# Altium PCB ESP_with_usb_2.PcbDoc
Units mil, origin at the board's own origin, x right, y up, seen from the top; angles counter-clockwise.
Board outline 1102.36 x 570.87 mil, 2 copper layers (Top Layer, Bottom Layer); 21 components, 19 nets, 81 pads, 18 vias.
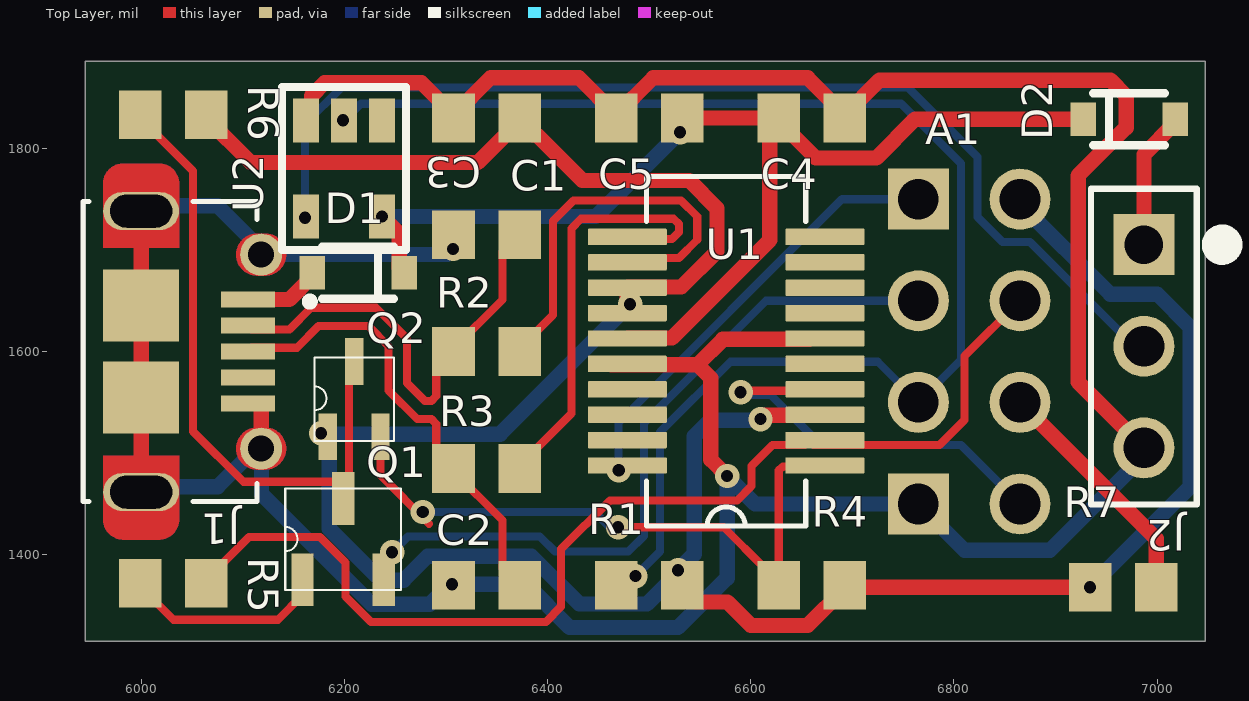
[diagram p0: Top Layer view]
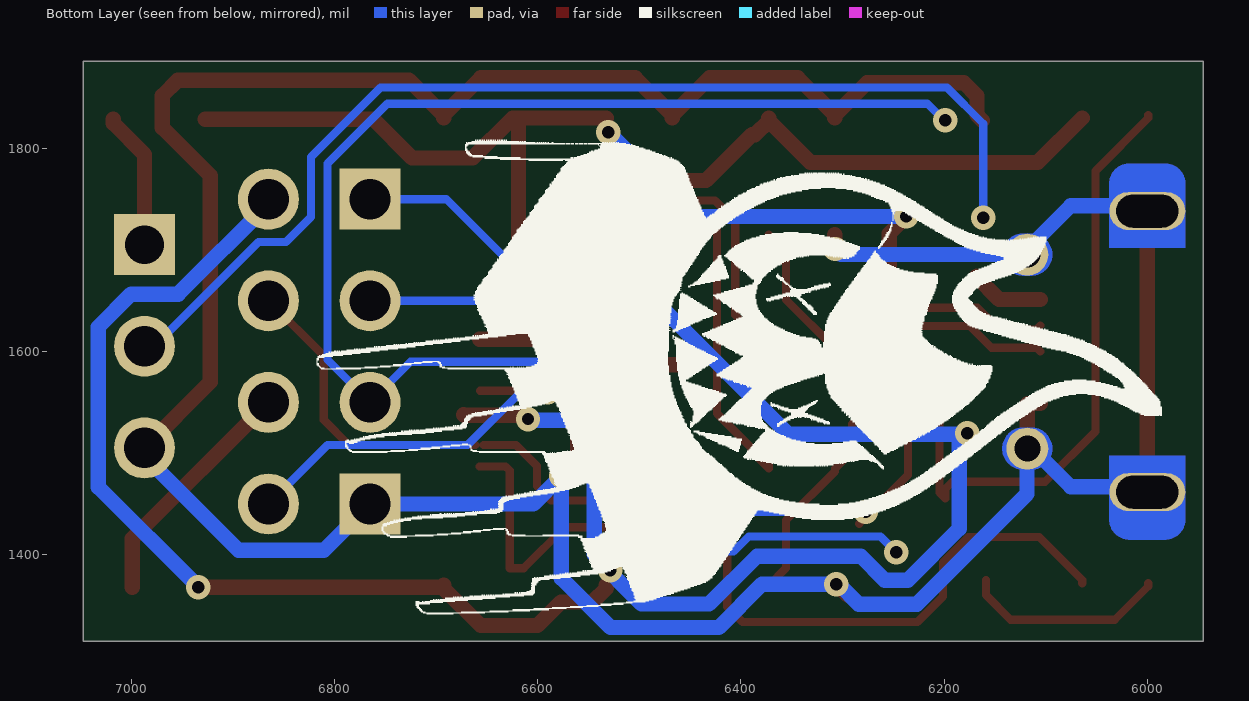
[diagram p1: Bottom Layer view, seen from below]
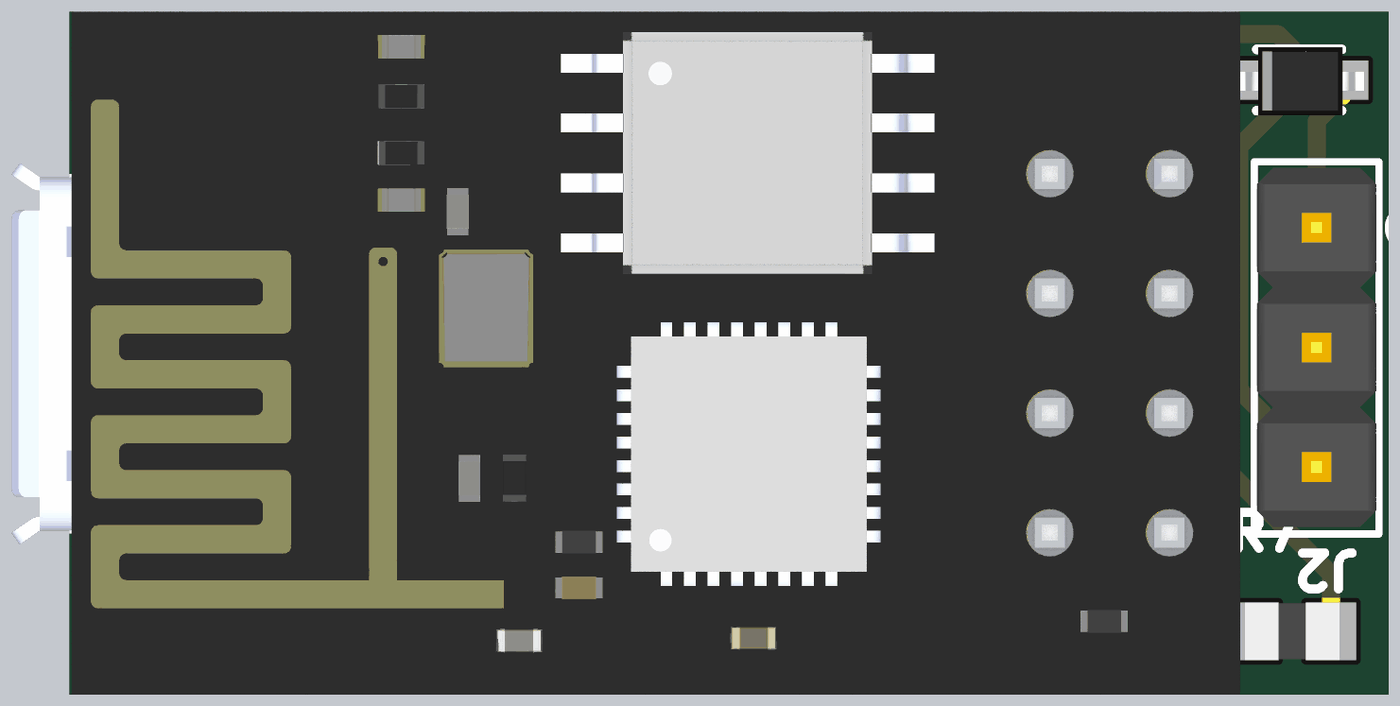
[diagram p2: 3D render of the assembled board from above, using the file's embedded part models]

## Layer stack, top to bottom
Top Solder: solder mask 0.4, Solder Resist, Dk 3.5
Top Layer: signal copper 1.4
Dielectric 1: dielectric 12.6, FR-4, Dk 4.8
Bottom Layer: signal copper 1.4
Bottom Solder: solder mask 0.4, Solder Resist, Dk 3.5

## Board outline
5945,1315 7047.36,1315 7047.36,1885.87 5945,1885.87

## Design rules (kind name [scope] priority, off if disabled: settings)
Clearance [All] p1: gap=8 ignorepadtopadclearanceinfootprint=FALSE except(0: Arc-Hole Track-Hole SMDPad-Hole THPad-Hole Via-Hole Fill-Hole Poly-Hole Region-Hole Text-Hole)
DiffPairsRouting [All] p1: maxlimit=10 minlimit=10 mostfreqgap=10 toplayer_minwidth=8 toplayer_maxwidth=15 toplayer_prefwidth=8 bottomlayer_minwidth=8 bottomlayer_maxwidth=15 bottomlayer_prefwidth=8 maxuncoupledlength=500
MatchedLengths [All] p1: tolerance=50 checknetsindiffpair=TRUE checkdiffpairvsdiffpair=FALSE checkxsignals=FALSE checkothers=FALSE
MinimumSolderMaskSliver [All] p1: minsoldermaskwidth=7.87
PolygonConnect [All] p1: connectstyle=Relief reliefconductorwidth=10 reliefentries=4 polygonreliefangle="90 Angle" airgapwidth=10
RoutingVias [All] p1: holewidth=12 width=24 viastyle="Through Hole" minholewidth=12 minwidth=24 maxholewidth=28 maxwidth=50
SolderMaskExpansion [All] p1: expansion=4
Width [All] p1: maxlimit=15 minlimit=8 preferedwidth=8
28 further rules are at their usual default settings.

## Classes and differential pairs
differential pair USB2: +USB2_P -USB2_N
differential pair USB1: +USB1_P -USB1_N

## Components (designator, comment, footprint, x,y, rotation, side; value= is the part's Value field where it differs from the comment)
A1 "ESP8266" ESP8266 6865,1450 r180 top
C1 "47pF" CC0805N 6340,1715 r0 top value=Value
C2 "47pF" CC0805N 6340,1370 r0 top value=Value
C3 "0.1uF" CC0805N 6340,1830 r0 top value=Value
C4 "0.1uF" CC0805N 6660,1830 r180 top value=Value
C5 "10uF" CC0805N 6500,1830 r0 top value=Value
D1 "Diode, Schottky" SOD-323 6213.58,1677.57 r180 top
D2 "Diode, Schottky" SOD-323 6972.44,1828.74 r0 top
J1 "micro USB B" "Micro USB B (rev 2)" 6002.95,1600 r270 top
J2 "3x Header Pins" "3 HEADER PIN" 6987,1705.28 r90 top value=Value
Q1 "NPN 2222A" SOT-23-3 6198.82,1415.35 r90 top
Q2 "N MOSFET" SOT-323 6209.65,1553.15 r90 top
R1 "10K Ω" CC0805N 6500,1370 r180 top value=Value
R2 "27 Ω" CC0805N 6340,1600 r180 top value=Value
R3 "27 Ω" CC0805N 6340,1485 r180 top value=Value
R4 "10K Ω" CC0805N 6660,1370 r180 top value=Value
R5 "10K Ω" CC0805N 6031.5,1372.05 r0 top value=Value
R6 "10K Ω" CC0805N 6031.5,1833 r180 top value=Value
R7 "10K Ω" CC0805N 6966.54,1368.11 r0 top value=Value
U1 "USB interface" 20-SSOP 6575.79,1600.39 r180 top
U2 "Buffer/level shifter" SOT-23-5 6199.8,1780.21 r270 top value=Value

## Footprints (in the part's own frame and the unit in brackets; to place one, negate y for a bottom-side part, rotate by r counter-clockwise, add the part's x,y. Pads: shape width x height; smd on the part's side, far side on the other; paste and mask are expansions set on the pad)
"3 HEADER PIN" [mil]
  rect 60x60 hole 38 mask+0: 1(0,0)
  round 60 hole 40 mask+0: 2(-100,0) 3(-200,0)
  silkscreen extent -256,-87 55,52, body extent -250,-50 50,50, height 374
20-SSOP [mm]
  rrect10% 1.97x0.41 smd: 1(-2.47,2.857) 2(-2.47,2.222) 3(-2.47,1.587) 4(-2.47,0.952) 5(-2.47,0.317) 6(-2.47,-0.318) 7(-2.47,-0.953) 8(-2.47,-1.588) 9(-2.47,-2.223) 10(-2.47,-2.858) 11(2.47,-2.857) 12(2.47,-2.222) 13(2.47,-1.587) 14(2.47,-0.952) 15(2.47,-0.317) 16(2.47,0.318) 17(2.47,0.953) 18(2.47,1.588) 19(2.47,2.223) 20(2.47,2.858)
  silkscreen extent -1.99,-4.37 1.99,4.37, body extent -3.1,-4.33 3.1,4.33, height 1.76
CC0805N [mil]
  rect 42x48 smd: 1(-32.5,0) 2(32.5,0)
  body extent -39,-24 39,24, height 28
ESP8266 [mil]
  round 60 hole 40: 1(0,0) 2(0,-100) 3(0,-200) 4(0,-300) 6(100,-200) 7(100,-100)
  rect 60x60 hole 40: 5(100,-300) 8(100,0)
  body extent -58,-436 918,135, height 251
"Micro USB B (rev 2)" [mm]
  rect 0.4x1.35 smd: 1(-1.3,2.6) 2(-0.65,2.6) 3(0,2.6) 4(0.65,2.6) 5(1.3,2.6)
  round 1.05 hole 0.65: S1(-2.425,2.925) S2(2.425,2.925)
  oval 0.95x1.9 hole 0.825 slot 1.55 at 90 deg: S3(-3.513,-0.075) S6(3.513,-0.075)
  rect 1.8x1.9 smd: S4(-1.15,-0.075) S5(1.15,-0.075)
  Top Layer region: 3.1,-0.075 2.6,-0.075 2.6,0.875 4.2,0.875 4.226,0.874 4.252,0.872 4.278,0.869 4.304,0.864 4.329,0.858 4.355,0.851 4.379,0.842 4.403,0.832 4.427,0.821 4.45,0.808 4.472,0.794 4.494,0.78 4.515,0.764 4.535,0.747 4.554,0.729 4.572,0.71 4.589,0.69 4.605,0.669 4.619,0.647 4.633,0.625 4.645,0.602 4.657,0.578 4.667,0.554 4.676,0.53 4.683,0.504 4.689,0.479 4.694,0.453 4.697,0.427 4.699,0.401 4.7,0.375 4.7,-0.075 3.925,-0.075 3.925,0.4 3.925,0.414 3.923,0.429 3.922,0.443 3.919,0.457 3.916,0.471 3.912,0.485 3.907,0.499 3.901,0.512 3.895,0.525 3.888,0.537 3.881,0.55 3.872,0.562 3.864,0.573 3.854,0.584 3.844,0.594 3.834,0.604 3.823,0.614 3.812,0.622 3.8,0.631 3.788,0.638 3.775,0.645 3.762,0.651 3.749,0.657 3.735,0.662 3.721,0.666 3.707,0.669 3.693,0.672 3.679,0.673 3.664,0.675 3.65,0.675 3.4,0.675 3.384,0.675 3.369,0.673 3.353,0.671 3.338,0.668 3.322,0.665 3.307,0.66 3.292,0.655 3.278,0.649 3.264,0.642 3.25,0.635 3.237,0.627 3.224,0.618 3.211,0.608 3.199,0.598 3.188,0.587 3.177,0.576 3.167,0.564 3.157,0.551 3.148,0.538 3.14,0.525 3.133,0.511 3.126,0.497 3.12,0.483 3.115,0.468 3.11,0.453 3.107,0.437 3.104,0.422 3.102,0.406 3.1,0.391 3.1,0.375 3.1,-0.075
  Top Layer region: -3.1,-0.075 -2.6,-0.075 -2.6,-1.025 -4.2,-1.025 -4.226,-1.024 -4.252,-1.022 -4.278,-1.019 -4.304,-1.014 -4.329,-1.008 -4.355,-1.001 -4.379,-0.992 -4.403,-0.982 -4.427,-0.971 -4.45,-0.958 -4.472,-0.944 -4.494,-0.93 -4.515,-0.914 -4.535,-0.897 -4.554,-0.879 -4.572,-0.86 -4.589,-0.84 -4.605,-0.819 -4.619,-0.797 -4.633,-0.775 -4.645,-0.752 -4.657,-0.728 -4.667,-0.704 -4.676,-0.68 -4.683,-0.654 -4.689,-0.629 -4.694,-0.603 -4.697,-0.577 -4.699,-0.551 -4.7,-0.525 -4.7,-0.075 -3.925,-0.075 -3.925,-0.55 -3.925,-0.564 -3.923,-0.579 -3.922,-0.593 -3.919,-0.607 -3.916,-0.621 -3.912,-0.635 -3.907,-0.649 -3.901,-0.662 -3.895,-0.675 -3.888,-0.687 -3.881,-0.7 -3.872,-0.712 -3.864,-0.723 -3.854,-0.734 -3.844,-0.744 -3.834,-0.754 -3.823,-0.764 -3.812,-0.772 -3.8,-0.781 -3.788,-0.788 -3.775,-0.795 -3.762,-0.801 -3.749,-0.807 -3.735,-0.812 -3.721,-0.816 -3.707,-0.819 -3.693,-0.822 -3.679,-0.823 -3.664,-0.825 -3.65,-0.825 -3.4,-0.825 -3.384,-0.825 -3.369,-0.823 -3.353,-0.821 -3.338,-0.818 -3.322,-0.815 -3.307,-0.81 -3.292,-0.805 -3.278,-0.799 -3.264,-0.792 -3.25,-0.785 -3.237,-0.777 -3.224,-0.768 -3.211,-0.758 -3.199,-0.748 -3.188,-0.737 -3.177,-0.726 -3.167,-0.714 -3.157,-0.701 -3.148,-0.688 -3.14,-0.675 -3.133,-0.661 -3.126,-0.647 -3.12,-0.633 -3.115,-0.618 -3.11,-0.603 -3.107,-0.587 -3.104,-0.572 -3.102,-0.556 -3.1,-0.541 -3.1,-0.525 -3.1,-0.075
  Top Layer region: 2.6,-1.025 4.2,-1.025 4.226,-1.024 4.252,-1.022 4.278,-1.019 4.304,-1.014 4.329,-1.008 4.355,-1.001 4.379,-0.992 4.403,-0.982 4.427,-0.971 4.45,-0.958 4.472,-0.944 4.494,-0.93 4.515,-0.914 4.535,-0.897 4.554,-0.879 4.572,-0.86 4.589,-0.84 4.605,-0.819 4.619,-0.797 4.633,-0.775 4.645,-0.752 4.657,-0.728 4.667,-0.704 4.676,-0.68 4.683,-0.654 4.689,-0.629 4.694,-0.603 4.697,-0.577 4.699,-0.551 4.7,-0.525 4.7,-0.075 3.925,-0.075 3.925,-0.525 3.925,-0.541 3.923,-0.556 3.921,-0.572 3.918,-0.587 3.915,-0.603 3.91,-0.618 3.905,-0.633 3.899,-0.647 3.892,-0.661 3.885,-0.675 3.877,-0.688 3.868,-0.701 3.858,-0.714 3.848,-0.726 3.837,-0.737 3.826,-0.748 3.814,-0.758 3.801,-0.768 3.788,-0.777 3.775,-0.785 3.761,-0.792 3.747,-0.799 3.733,-0.805 3.718,-0.81 3.703,-0.815 3.687,-0.818 3.672,-0.821 3.656,-0.823 3.641,-0.825 3.625,-0.825 3.4,-0.825 3.384,-0.825 3.369,-0.823 3.353,-0.821 3.338,-0.818 3.322,-0.815 3.307,-0.81 3.292,-0.805 3.278,-0.799 3.264,-0.792 3.25,-0.785 3.237,-0.777 3.224,-0.768 3.211,-0.758 3.199,-0.748 3.188,-0.737 3.177,-0.726 3.167,-0.714 3.157,-0.701 3.148,-0.688 3.14,-0.675 3.133,-0.661 3.126,-0.647 3.12,-0.633 3.115,-0.618 3.11,-0.603 3.107,-0.587 3.104,-0.572 3.102,-0.556 3.1,-0.541 3.1,-0.525 3.1,-0.075 2.6,-0.075 2.6,-1.025
  Top Layer region: -2.6,0.875 -4.2,0.875 -4.226,0.874 -4.252,0.872 -4.278,0.869 -4.304,0.864 -4.329,0.858 -4.355,0.851 -4.379,0.842 -4.403,0.832 -4.427,0.821 -4.45,0.808 -4.472,0.794 -4.494,0.78 -4.515,0.764 -4.535,0.747 -4.554,0.729 -4.572,0.71 -4.589,0.69 -4.605,0.669 -4.619,0.647 -4.633,0.625 -4.645,0.602 -4.657,0.578 -4.667,0.554 -4.676,0.53 -4.683,0.504 -4.689,0.479 -4.694,0.453 -4.697,0.427 -4.699,0.401 -4.7,0.375 -4.7,-0.075 -3.925,-0.075 -3.925,0.375 -3.925,0.391 -3.923,0.406 -3.921,0.422 -3.918,0.437 -3.915,0.453 -3.91,0.468 -3.905,0.483 -3.899,0.497 -3.892,0.511 -3.885,0.525 -3.877,0.538 -3.868,0.551 -3.858,0.564 -3.848,0.576 -3.837,0.587 -3.826,0.598 -3.814,0.608 -3.801,0.618 -3.788,0.627 -3.775,0.635 -3.761,0.642 -3.747,0.649 -3.733,0.655 -3.718,0.66 -3.703,0.665 -3.687,0.668 -3.672,0.671 -3.656,0.673 -3.641,0.675 -3.625,0.675 -3.4,0.675 -3.384,0.675 -3.369,0.673 -3.353,0.671 -3.338,0.668 -3.322,0.665 -3.307,0.66 -3.292,0.655 -3.278,0.649 -3.264,0.642 -3.25,0.635 -3.237,0.627 -3.224,0.618 -3.211,0.608 -3.199,0.598 -3.188,0.587 -3.177,0.576 -3.167,0.564 -3.157,0.551 -3.148,0.538 -3.14,0.525 -3.133,0.511 -3.126,0.497 -3.12,0.483 -3.115,0.468 -3.11,0.453 -3.107,0.437 -3.104,0.422 -3.102,0.406 -3.1,0.391 -3.1,0.375 -3.1,-0.075 -2.6,-0.075 -2.6,0.875
  Top Layer region: 2.425,2.5 2.425,2.3 2.398,2.301 2.37,2.303 2.343,2.306 2.316,2.311 2.289,2.318 2.263,2.326 2.237,2.335 2.211,2.345 2.187,2.357 2.163,2.37 2.139,2.385 2.116,2.4 2.095,2.417 2.074,2.435 2.054,2.454 2.035,2.474 2.017,2.495 2,2.516 1.985,2.539 1.97,2.562 1.957,2.587 1.945,2.611 1.935,2.637 1.926,2.663 1.918,2.689 1.911,2.716 1.906,2.743 1.903,2.77 1.901,2.798 1.9,2.825 1.9,3.025 1.901,3.052 1.903,3.08 1.906,3.107 1.911,3.134 1.918,3.161 1.926,3.187 1.935,3.213 1.945,3.239 1.957,3.263 1.97,3.287 1.985,3.311 2,3.334 2.017,3.355 2.035,3.376 2.054,3.396 2.074,3.415 2.095,3.433 2.116,3.45 2.139,3.465 2.163,3.48 2.187,3.493 2.211,3.505 2.237,3.515 2.263,3.524 2.289,3.532 2.316,3.539 2.343,3.544 2.37,3.547 2.398,3.549 2.425,3.55 2.425,3.35 2.408,3.35 2.391,3.348 2.374,3.346 2.357,3.343 2.341,3.339 2.325,3.334 2.309,3.328 2.293,3.322 2.277,3.315 2.262,3.306 2.248,3.298 2.234,3.288 2.22,3.278 2.208,3.267 2.195,3.255 2.183,3.242 2.172,3.23 2.162,3.216 2.152,3.202 2.144,3.187 2.135,3.173 2.128,3.157 2.122,3.141 2.116,3.125 2.111,3.109 2.107,3.093 2.104,3.076 2.102,3.059 2.1,3.042 2.1,3.025 2.1,2.825 2.1,2.808 2.102,2.791 2.104,2.774 2.107,2.757 2.111,2.741 2.116,2.725 2.122,2.709 2.128,2.693 2.135,2.677 2.144,2.662 2.152,2.648 2.162,2.634 2.172,2.62 2.183,2.608 2.195,2.595 2.208,2.583 2.22,2.572 2.234,2.562 2.248,2.552 2.262,2.544 2.277,2.535 2.293,2.528 2.309,2.522 2.325,2.516 2.341,2.511 2.357,2.507 2.374,2.504 2.391,2.502 2.408,2.5 2.425,2.5
  Top Layer region: 2.425,3.35 2.425,3.55 2.452,3.549 2.48,3.547 2.507,3.544 2.534,3.539 2.561,3.532 2.587,3.524 2.613,3.515 2.639,3.505 2.663,3.493 2.688,3.48 2.711,3.465 2.734,3.45 2.755,3.433 2.776,3.415 2.796,3.396 2.815,3.376 2.833,3.355 2.85,3.334 2.865,3.311 2.88,3.287 2.893,3.263 2.905,3.239 2.915,3.213 2.924,3.187 2.932,3.161 2.939,3.134 2.944,3.107 2.947,3.08 2.949,3.052 2.95,3.025 2.95,2.825 2.949,2.798 2.947,2.77 2.944,2.743 2.939,2.716 2.932,2.689 2.924,2.663 2.915,2.637 2.905,2.611 2.893,2.587 2.88,2.562 2.865,2.539 2.85,2.516 2.833,2.495 2.815,2.474 2.796,2.454 2.776,2.435 2.755,2.417 2.734,2.4 2.711,2.385 2.688,2.37 2.663,2.357 2.639,2.345 2.613,2.335 2.587,2.326 2.561,2.318 2.534,2.311 2.507,2.306 2.48,2.303 2.452,2.301 2.425,2.3 2.425,2.5 2.442,2.5 2.459,2.502 2.476,2.504 2.493,2.507 2.509,2.511 2.525,2.516 2.541,2.522 2.557,2.528 2.573,2.535 2.588,2.544 2.602,2.552 2.616,2.562 2.63,2.572 2.642,2.583 2.655,2.595 2.667,2.608 2.678,2.62 2.688,2.634 2.698,2.648 2.706,2.662 2.715,2.677 2.722,2.693 2.728,2.709 2.734,2.725 2.739,2.741 2.743,2.757 2.746,2.774 2.748,2.791 2.75,2.808 2.75,2.825 2.75,3.025 2.75,3.042 2.748,3.059 2.746,3.076 2.743,3.093 2.739,3.109 2.734,3.125 2.728,3.141 2.722,3.157 2.715,3.173 2.706,3.187 2.698,3.202 2.688,3.216 2.678,3.23 2.667,3.242 2.655,3.255 2.642,3.267 2.63,3.278 2.616,3.288 2.602,3.298 2.588,3.306 2.573,3.315 2.557,3.322 2.541,3.328 2.525,3.334 2.509,3.339 2.493,3.343 2.476,3.346 2.459,3.348 2.442,3.35 2.425,3.35
  Top Layer region: -2.425,2.5 -2.425,2.3 -2.452,2.301 -2.48,2.303 -2.507,2.306 -2.534,2.311 -2.561,2.318 -2.587,2.326 -2.613,2.335 -2.639,2.345 -2.663,2.357 -2.688,2.37 -2.711,2.385 -2.734,2.4 -2.755,2.417 -2.776,2.435 -2.796,2.454 -2.815,2.474 -2.833,2.495 -2.85,2.516 -2.865,2.539 -2.88,2.562 -2.893,2.587 -2.905,2.611 -2.915,2.637 -2.924,2.663 -2.932,2.689 -2.939,2.716 -2.944,2.743 -2.947,2.77 -2.949,2.798 -2.95,2.825 -2.95,3.025 -2.949,3.052 -2.947,3.08 -2.944,3.107 -2.939,3.134 -2.932,3.161 -2.924,3.187 -2.915,3.213 -2.905,3.239 -2.893,3.263 -2.88,3.287 -2.865,3.311 -2.85,3.334 -2.833,3.355 -2.815,3.376 -2.796,3.396 -2.776,3.415 -2.755,3.433 -2.734,3.45 -2.711,3.465 -2.688,3.48 -2.663,3.493 -2.639,3.505 -2.613,3.515 -2.587,3.524 -2.561,3.532 -2.534,3.539 -2.507,3.544 -2.48,3.547 -2.452,3.549 -2.425,3.55 -2.425,3.35 -2.442,3.35 -2.459,3.348 -2.476,3.346 -2.493,3.343 -2.509,3.339 -2.525,3.334 -2.541,3.328 -2.557,3.322 -2.573,3.315 -2.588,3.306 -2.602,3.298 -2.616,3.288 -2.63,3.278 -2.642,3.267 -2.655,3.255 -2.667,3.242 -2.678,3.23 -2.688,3.216 -2.698,3.202 -2.706,3.187 -2.715,3.173 -2.722,3.157 -2.728,3.141 -2.734,3.125 -2.739,3.109 -2.743,3.093 -2.746,3.076 -2.748,3.059 -2.75,3.042 -2.75,3.025 -2.75,2.825 -2.75,2.808 -2.748,2.791 -2.746,2.774 -2.743,2.757 -2.739,2.741 -2.734,2.725 -2.728,2.709 -2.722,2.693 -2.715,2.677 -2.706,2.662 -2.698,2.648 -2.688,2.634 -2.678,2.62 -2.667,2.608 -2.655,2.595 -2.642,2.583 -2.63,2.572 -2.616,2.562 -2.602,2.552 -2.588,2.544 -2.573,2.535 -2.557,2.528 -2.541,2.522 -2.525,2.516 -2.509,2.511 -2.493,2.507 -2.476,2.504 -2.459,2.502 -2.442,2.5 -2.425,2.5
  Top Layer region: -2.425,3.35 -2.425,3.55 -2.398,3.549 -2.37,3.547 -2.343,3.544 -2.316,3.539 -2.289,3.532 -2.263,3.524 -2.237,3.515 -2.211,3.505 -2.187,3.493 -2.163,3.48 -2.139,3.465 -2.116,3.45 -2.095,3.433 -2.074,3.415 -2.054,3.396 -2.035,3.376 -2.017,3.355 -2,3.334 -1.985,3.311 -1.97,3.287 -1.957,3.263 -1.945,3.239 -1.935,3.213 -1.926,3.187 -1.918,3.161 -1.911,3.134 -1.906,3.107 -1.903,3.08 -1.901,3.052 -1.9,3.025 -1.9,2.825 -1.901,2.798 -1.903,2.77 -1.906,2.743 -1.911,2.716 -1.918,2.689 -1.926,2.663 -1.935,2.637 -1.945,2.611 -1.957,2.587 -1.97,2.562 -1.985,2.539 -2,2.516 -2.017,2.495 -2.035,2.474 -2.054,2.454 -2.074,2.435 -2.095,2.417 -2.116,2.4 -2.139,2.385 -2.163,2.37 -2.187,2.357 -2.211,2.345 -2.237,2.335 -2.263,2.326 -2.289,2.318 -2.316,2.311 -2.343,2.306 -2.37,2.303 -2.398,2.301 -2.425,2.3 -2.425,2.5 -2.408,2.5 -2.391,2.502 -2.374,2.504 -2.357,2.507 -2.341,2.511 -2.325,2.516 -2.309,2.522 -2.293,2.528 -2.277,2.535 -2.262,2.544 -2.248,2.552 -2.234,2.562 -2.22,2.572 -2.208,2.583 -2.195,2.595 -2.183,2.608 -2.172,2.62 -2.162,2.634 -2.152,2.648 -2.144,2.662 -2.135,2.677 -2.128,2.693 -2.122,2.709 -2.116,2.725 -2.111,2.741 -2.107,2.757 -2.104,2.774 -2.102,2.791 -2.1,2.808 -2.1,2.825 -2.1,3.025 -2.1,3.042 -2.102,3.059 -2.104,3.076 -2.107,3.093 -2.111,3.109 -2.116,3.125 -2.122,3.141 -2.128,3.157 -2.135,3.173 -2.144,3.187 -2.152,3.202 -2.162,3.216 -2.172,3.23 -2.183,3.242 -2.195,3.255 -2.208,3.267 -2.22,3.278 -2.234,3.288 -2.248,3.298 -2.262,3.306 -2.277,3.315 -2.293,3.322 -2.309,3.328 -2.325,3.334 -2.341,3.339 -2.357,3.343 -2.374,3.346 -2.391,3.348 -2.408,3.35 -2.425,3.35
  Bottom Layer region: 3.1,-0.075 2.6,-0.075 2.6,0.875 4.2,0.875 4.226,0.874 4.252,0.872 4.278,0.869 4.304,0.864 4.329,0.858 4.355,0.851 4.379,0.842 4.403,0.832 4.427,0.821 4.45,0.808 4.472,0.794 4.494,0.78 4.515,0.764 4.535,0.747 4.554,0.729 4.572,0.71 4.589,0.69 4.605,0.669 4.619,0.647 4.633,0.625 4.645,0.602 4.657,0.578 4.667,0.554 4.676,0.53 4.683,0.504 4.689,0.479 4.694,0.453 4.697,0.427 4.699,0.401 4.7,0.375 4.7,-0.075 3.925,-0.075 3.925,0.4 3.925,0.414 3.923,0.429 3.922,0.443 3.919,0.457 3.916,0.471 3.912,0.485 3.907,0.499 3.901,0.512 3.895,0.525 3.888,0.537 3.881,0.55 3.872,0.562 3.864,0.573 3.854,0.584 3.844,0.594 3.834,0.604 3.823,0.614 3.812,0.622 3.8,0.631 3.788,0.638 3.775,0.645 3.762,0.651 3.749,0.657 3.735,0.662 3.721,0.666 3.707,0.669 3.693,0.672 3.679,0.673 3.664,0.675 3.65,0.675 3.4,0.675 3.384,0.675 3.369,0.673 3.353,0.671 3.338,0.668 3.322,0.665 3.307,0.66 3.292,0.655 3.278,0.649 3.264,0.642 3.25,0.635 3.237,0.627 3.224,0.618 3.211,0.608 3.199,0.598 3.188,0.587 3.177,0.576 3.167,0.564 3.157,0.551 3.148,0.538 3.14,0.525 3.133,0.511 3.126,0.497 3.12,0.483 3.115,0.468 3.11,0.453 3.107,0.437 3.104,0.422 3.102,0.406 3.1,0.391 3.1,0.375 3.1,-0.075
  Bottom Layer region: -3.1,-0.075 -2.6,-0.075 -2.6,-1.025 -4.2,-1.025 -4.226,-1.024 -4.252,-1.022 -4.278,-1.019 -4.304,-1.014 -4.329,-1.008 -4.355,-1.001 -4.379,-0.992 -4.403,-0.982 -4.427,-0.971 -4.45,-0.958 -4.472,-0.944 -4.494,-0.93 -4.515,-0.914 -4.535,-0.897 -4.554,-0.879 -4.572,-0.86 -4.589,-0.84 -4.605,-0.819 -4.619,-0.797 -4.633,-0.775 -4.645,-0.752 -4.657,-0.728 -4.667,-0.704 -4.676,-0.68 -4.683,-0.654 -4.689,-0.629 -4.694,-0.603 -4.697,-0.577 -4.699,-0.551 -4.7,-0.525 -4.7,-0.075 -3.925,-0.075 -3.925,-0.55 -3.925,-0.564 -3.923,-0.579 -3.922,-0.593 -3.919,-0.607 -3.916,-0.621 -3.912,-0.635 -3.907,-0.649 -3.901,-0.662 -3.895,-0.675 -3.888,-0.687 -3.881,-0.7 -3.872,-0.712 -3.864,-0.723 -3.854,-0.734 -3.844,-0.744 -3.834,-0.754 -3.823,-0.764 -3.812,-0.772 -3.8,-0.781 -3.788,-0.788 -3.775,-0.795 -3.762,-0.801 -3.749,-0.807 -3.735,-0.812 -3.721,-0.816 -3.707,-0.819 -3.693,-0.822 -3.679,-0.823 -3.664,-0.825 -3.65,-0.825 -3.4,-0.825 -3.384,-0.825 -3.369,-0.823 -3.353,-0.821 -3.338,-0.818 -3.322,-0.815 -3.307,-0.81 -3.292,-0.805 -3.278,-0.799 -3.264,-0.792 -3.25,-0.785 -3.237,-0.777 -3.224,-0.768 -3.211,-0.758 -3.199,-0.748 -3.188,-0.737 -3.177,-0.726 -3.167,-0.714 -3.157,-0.701 -3.148,-0.688 -3.14,-0.675 -3.133,-0.661 -3.126,-0.647 -3.12,-0.633 -3.115,-0.618 -3.11,-0.603 -3.107,-0.587 -3.104,-0.572 -3.102,-0.556 -3.1,-0.541 -3.1,-0.525 -3.1,-0.075
  Bottom Layer region: 2.6,-1.025 4.2,-1.025 4.226,-1.024 4.252,-1.022 4.278,-1.019 4.304,-1.014 4.329,-1.008 4.355,-1.001 4.379,-0.992 4.403,-0.982 4.427,-0.971 4.45,-0.958 4.472,-0.944 4.494,-0.93 4.515,-0.914 4.535,-0.897 4.554,-0.879 4.572,-0.86 4.589,-0.84 4.605,-0.819 4.619,-0.797 4.633,-0.775 4.645,-0.752 4.657,-0.728 4.667,-0.704 4.676,-0.68 4.683,-0.654 4.689,-0.629 4.694,-0.603 4.697,-0.577 4.699,-0.551 4.7,-0.525 4.7,-0.075 3.925,-0.075 3.925,-0.525 3.925,-0.541 3.923,-0.556 3.921,-0.572 3.918,-0.587 3.915,-0.603 3.91,-0.618 3.905,-0.633 3.899,-0.647 3.892,-0.661 3.885,-0.675 3.877,-0.688 3.868,-0.701 3.858,-0.714 3.848,-0.726 3.837,-0.737 3.826,-0.748 3.814,-0.758 3.801,-0.768 3.788,-0.777 3.775,-0.785 3.761,-0.792 3.747,-0.799 3.733,-0.805 3.718,-0.81 3.703,-0.815 3.687,-0.818 3.672,-0.821 3.656,-0.823 3.641,-0.825 3.625,-0.825 3.4,-0.825 3.384,-0.825 3.369,-0.823 3.353,-0.821 3.338,-0.818 3.322,-0.815 3.307,-0.81 3.292,-0.805 3.278,-0.799 3.264,-0.792 3.25,-0.785 3.237,-0.777 3.224,-0.768 3.211,-0.758 3.199,-0.748 3.188,-0.737 3.177,-0.726 3.167,-0.714 3.157,-0.701 3.148,-0.688 3.14,-0.675 3.133,-0.661 3.126,-0.647 3.12,-0.633 3.115,-0.618 3.11,-0.603 3.107,-0.587 3.104,-0.572 3.102,-0.556 3.1,-0.541 3.1,-0.525 3.1,-0.075 2.6,-0.075 2.6,-1.025
  Bottom Layer region: -2.6,0.875 -4.2,0.875 -4.226,0.874 -4.252,0.872 -4.278,0.869 -4.304,0.864 -4.329,0.858 -4.355,0.851 -4.379,0.842 -4.403,0.832 -4.427,0.821 -4.45,0.808 -4.472,0.794 -4.494,0.78 -4.515,0.764 -4.535,0.747 -4.554,0.729 -4.572,0.71 -4.589,0.69 -4.605,0.669 -4.619,0.647 -4.633,0.625 -4.645,0.602 -4.657,0.578 -4.667,0.554 -4.676,0.53 -4.683,0.504 -4.689,0.479 -4.694,0.453 -4.697,0.427 -4.699,0.401 -4.7,0.375 -4.7,-0.075 -3.925,-0.075 -3.925,0.375 -3.925,0.391 -3.923,0.406 -3.921,0.422 -3.918,0.437 -3.915,0.453 -3.91,0.468 -3.905,0.483 -3.899,0.497 -3.892,0.511 -3.885,0.525 -3.877,0.538 -3.868,0.551 -3.858,0.564 -3.848,0.576 -3.837,0.587 -3.826,0.598 -3.814,0.608 -3.801,0.618 -3.788,0.627 -3.775,0.635 -3.761,0.642 -3.747,0.649 -3.733,0.655 -3.718,0.66 -3.703,0.665 -3.687,0.668 -3.672,0.671 -3.656,0.673 -3.641,0.675 -3.625,0.675 -3.4,0.675 -3.384,0.675 -3.369,0.673 -3.353,0.671 -3.338,0.668 -3.322,0.665 -3.307,0.66 -3.292,0.655 -3.278,0.649 -3.264,0.642 -3.25,0.635 -3.237,0.627 -3.224,0.618 -3.211,0.608 -3.199,0.598 -3.188,0.587 -3.177,0.576 -3.167,0.564 -3.157,0.551 -3.148,0.538 -3.14,0.525 -3.133,0.511 -3.126,0.497 -3.12,0.483 -3.115,0.468 -3.11,0.453 -3.107,0.437 -3.104,0.422 -3.102,0.406 -3.1,0.391 -3.1,0.375 -3.1,-0.075 -2.6,-0.075 -2.6,0.875
  Bottom Layer region: 2.425,2.5 2.425,2.3 2.398,2.301 2.37,2.303 2.343,2.306 2.316,2.311 2.289,2.318 2.263,2.326 2.237,2.335 2.211,2.345 2.187,2.357 2.163,2.37 2.139,2.385 2.116,2.4 2.095,2.417 2.074,2.435 2.054,2.454 2.035,2.474 2.017,2.495 2,2.516 1.985,2.539 1.97,2.562 1.957,2.587 1.945,2.611 1.935,2.637 1.926,2.663 1.918,2.689 1.911,2.716 1.906,2.743 1.903,2.77 1.901,2.798 1.9,2.825 1.9,3.025 1.901,3.052 1.903,3.08 1.906,3.107 1.911,3.134 1.918,3.161 1.926,3.187 1.935,3.213 1.945,3.239 1.957,3.263 1.97,3.287 1.985,3.311 2,3.334 2.017,3.355 2.035,3.376 2.054,3.396 2.074,3.415 2.095,3.433 2.116,3.45 2.139,3.465 2.163,3.48 2.187,3.493 2.211,3.505 2.237,3.515 2.263,3.524 2.289,3.532 2.316,3.539 2.343,3.544 2.37,3.547 2.398,3.549 2.425,3.55 2.425,3.35 2.408,3.35 2.391,3.348 2.374,3.346 2.357,3.343 2.341,3.339 2.325,3.334 2.309,3.328 2.293,3.322 2.277,3.315 2.262,3.306 2.248,3.298 2.234,3.288 2.22,3.278 2.208,3.267 2.195,3.255 2.183,3.242 2.172,3.23 2.162,3.216 2.152,3.202 2.144,3.187 2.135,3.173 2.128,3.157 2.122,3.141 2.116,3.125 2.111,3.109 2.107,3.093 2.104,3.076 2.102,3.059 2.1,3.042 2.1,3.025 2.1,2.825 2.1,2.808 2.102,2.791 2.104,2.774 2.107,2.757 2.111,2.741 2.116,2.725 2.122,2.709 2.128,2.693 2.135,2.677 2.144,2.662 2.152,2.648 2.162,2.634 2.172,2.62 2.183,2.608 2.195,2.595 2.208,2.583 2.22,2.572 2.234,2.562 2.248,2.552 2.262,2.544 2.277,2.535 2.293,2.528 2.309,2.522 2.325,2.516 2.341,2.511 2.357,2.507 2.374,2.504 2.391,2.502 2.408,2.5 2.425,2.5
  Bottom Layer region: 2.425,3.35 2.425,3.55 2.452,3.549 2.48,3.547 2.507,3.544 2.534,3.539 2.561,3.532 2.587,3.524 2.613,3.515 2.639,3.505 2.663,3.493 2.688,3.48 2.711,3.465 2.734,3.45 2.755,3.433 2.776,3.415 2.796,3.396 2.815,3.376 2.833,3.355 2.85,3.334 2.865,3.311 2.88,3.287 2.893,3.263 2.905,3.239 2.915,3.213 2.924,3.187 2.932,3.161 2.939,3.134 2.944,3.107 2.947,3.08 2.949,3.052 2.95,3.025 2.95,2.825 2.949,2.798 2.947,2.77 2.944,2.743 2.939,2.716 2.932,2.689 2.924,2.663 2.915,2.637 2.905,2.611 2.893,2.587 2.88,2.562 2.865,2.539 2.85,2.516 2.833,2.495 2.815,2.474 2.796,2.454 2.776,2.435 2.755,2.417 2.734,2.4 2.711,2.385 2.688,2.37 2.663,2.357 2.639,2.345 2.613,2.335 2.587,2.326 2.561,2.318 2.534,2.311 2.507,2.306 2.48,2.303 2.452,2.301 2.425,2.3 2.425,2.5 2.442,2.5 2.459,2.502 2.476,2.504 2.493,2.507 2.509,2.511 2.525,2.516 2.541,2.522 2.557,2.528 2.573,2.535 2.588,2.544 2.602,2.552 2.616,2.562 2.63,2.572 2.642,2.583 2.655,2.595 2.667,2.608 2.678,2.62 2.688,2.634 2.698,2.648 2.706,2.662 2.715,2.677 2.722,2.693 2.728,2.709 2.734,2.725 2.739,2.741 2.743,2.757 2.746,2.774 2.748,2.791 2.75,2.808 2.75,2.825 2.75,3.025 2.75,3.042 2.748,3.059 2.746,3.076 2.743,3.093 2.739,3.109 2.734,3.125 2.728,3.141 2.722,3.157 2.715,3.173 2.706,3.187 2.698,3.202 2.688,3.216 2.678,3.23 2.667,3.242 2.655,3.255 2.642,3.267 2.63,3.278 2.616,3.288 2.602,3.298 2.588,3.306 2.573,3.315 2.557,3.322 2.541,3.328 2.525,3.334 2.509,3.339 2.493,3.343 2.476,3.346 2.459,3.348 2.442,3.35 2.425,3.35
  Bottom Layer region: -2.425,2.5 -2.425,2.3 -2.452,2.301 -2.48,2.303 -2.507,2.306 -2.534,2.311 -2.561,2.318 -2.587,2.326 -2.613,2.335 -2.639,2.345 -2.663,2.357 -2.688,2.37 -2.711,2.385 -2.734,2.4 -2.755,2.417 -2.776,2.435 -2.796,2.454 -2.815,2.474 -2.833,2.495 -2.85,2.516 -2.865,2.539 -2.88,2.562 -2.893,2.587 -2.905,2.611 -2.915,2.637 -2.924,2.663 -2.932,2.689 -2.939,2.716 -2.944,2.743 -2.947,2.77 -2.949,2.798 -2.95,2.825 -2.95,3.025 -2.949,3.052 -2.947,3.08 -2.944,3.107 -2.939,3.134 -2.932,3.161 -2.924,3.187 -2.915,3.213 -2.905,3.239 -2.893,3.263 -2.88,3.287 -2.865,3.311 -2.85,3.334 -2.833,3.355 -2.815,3.376 -2.796,3.396 -2.776,3.415 -2.755,3.433 -2.734,3.45 -2.711,3.465 -2.688,3.48 -2.663,3.493 -2.639,3.505 -2.613,3.515 -2.587,3.524 -2.561,3.532 -2.534,3.539 -2.507,3.544 -2.48,3.547 -2.452,3.549 -2.425,3.55 -2.425,3.35 -2.442,3.35 -2.459,3.348 -2.476,3.346 -2.493,3.343 -2.509,3.339 -2.525,3.334 -2.541,3.328 -2.557,3.322 -2.573,3.315 -2.588,3.306 -2.602,3.298 -2.616,3.288 -2.63,3.278 -2.642,3.267 -2.655,3.255 -2.667,3.242 -2.678,3.23 -2.688,3.216 -2.698,3.202 -2.706,3.187 -2.715,3.173 -2.722,3.157 -2.728,3.141 -2.734,3.125 -2.739,3.109 -2.743,3.093 -2.746,3.076 -2.748,3.059 -2.75,3.042 -2.75,3.025 -2.75,2.825 -2.75,2.808 -2.748,2.791 -2.746,2.774 -2.743,2.757 -2.739,2.741 -2.734,2.725 -2.728,2.709 -2.722,2.693 -2.715,2.677 -2.706,2.662 -2.698,2.648 -2.688,2.634 -2.678,2.62 -2.667,2.608 -2.655,2.595 -2.642,2.583 -2.63,2.572 -2.616,2.562 -2.602,2.552 -2.588,2.544 -2.573,2.535 -2.557,2.528 -2.541,2.522 -2.525,2.516 -2.509,2.511 -2.493,2.507 -2.476,2.504 -2.459,2.502 -2.442,2.5 -2.425,2.5
  Bottom Layer region: -2.425,3.35 -2.425,3.55 -2.398,3.549 -2.37,3.547 -2.343,3.544 -2.316,3.539 -2.289,3.532 -2.263,3.524 -2.237,3.515 -2.211,3.505 -2.187,3.493 -2.163,3.48 -2.139,3.465 -2.116,3.45 -2.095,3.433 -2.074,3.415 -2.054,3.396 -2.035,3.376 -2.017,3.355 -2,3.334 -1.985,3.311 -1.97,3.287 -1.957,3.263 -1.945,3.239 -1.935,3.213 -1.926,3.187 -1.918,3.161 -1.911,3.134 -1.906,3.107 -1.903,3.08 -1.901,3.052 -1.9,3.025 -1.9,2.825 -1.901,2.798 -1.903,2.77 -1.906,2.743 -1.911,2.716 -1.918,2.689 -1.926,2.663 -1.935,2.637 -1.945,2.611 -1.957,2.587 -1.97,2.562 -1.985,2.539 -2,2.516 -2.017,2.495 -2.035,2.474 -2.054,2.454 -2.074,2.435 -2.095,2.417 -2.116,2.4 -2.139,2.385 -2.163,2.37 -2.187,2.357 -2.211,2.345 -2.237,2.335 -2.263,2.326 -2.289,2.318 -2.316,2.311 -2.343,2.306 -2.37,2.303 -2.398,2.301 -2.425,2.3 -2.425,2.5 -2.408,2.5 -2.391,2.502 -2.374,2.504 -2.357,2.507 -2.341,2.511 -2.325,2.516 -2.309,2.522 -2.293,2.528 -2.277,2.535 -2.262,2.544 -2.248,2.552 -2.234,2.562 -2.22,2.572 -2.208,2.583 -2.195,2.595 -2.183,2.608 -2.172,2.62 -2.162,2.634 -2.152,2.648 -2.144,2.662 -2.135,2.677 -2.128,2.693 -2.122,2.709 -2.116,2.725 -2.111,2.741 -2.107,2.757 -2.104,2.774 -2.102,2.791 -2.1,2.808 -2.1,2.825 -2.1,3.025 -2.1,3.042 -2.102,3.059 -2.104,3.076 -2.107,3.093 -2.111,3.109 -2.116,3.125 -2.122,3.141 -2.128,3.157 -2.135,3.173 -2.144,3.187 -2.152,3.202 -2.162,3.216 -2.172,3.23 -2.183,3.242 -2.195,3.255 -2.208,3.267 -2.22,3.278 -2.234,3.288 -2.248,3.298 -2.262,3.306 -2.277,3.315 -2.293,3.322 -2.309,3.328 -2.325,3.334 -2.341,3.339 -2.357,3.343 -2.374,3.346 -2.391,3.348 -2.408,3.35 -2.425,3.35
  silkscreen extent -3.75,-1.52 3.75,4.24, body extent -4.05,-2.7 4.05,3.1, height 2.78
SOD-323 [mm]
  rect 0.63x0.83 smd: A(1.15,0) C(-1.15,0)
  silkscreen extent -0.9,-0.65 0.9,0.65, body extent -1.32,-0.75 1.38,0.7, height 1.13
SOT-23-3 [mil]
  rect 52x22 smd: 1(-40,40) 2(-40,-40) 3(40,0)
  silkscreen extent -50,-57 50,57, body extent -47,-57 47,57, height 45
SOT-23-5 [mm]
  rect 1.1x0.65 smd paste-0.102 mask+0.051: 1(-1.2,0.95) 2(-1.2,0) 3(-1.2,-0.95) 4(1.2,-0.95) 5(1.2,0.95)
  silkscreen extent -2.03,-1.55 2.03,1.55, body extent -1.4,-1.45 1.4,1.45, height 1.2
SOT-323 [mil]
  rect 46x18 smd: 1(-37,26) 2(-37,-26) 3(37,0)
  silkscreen extent -41,-39 41,39, body extent -41,-39 41,39, height 42

## Part data
A1: "RX TXRX MODULE WIFI TRACE ANT TH", Supplier Part Number 1=1597-1145-ND, Supplier 1=Digi-Key
C1 C2: library part C0805C470J5GACTU, "CAP CER 47PF 50V C0G/NP0 0805", Manufacturer_Part_Number=CC0805KRX7R9BB104, Supplier Part Number 1=399-1117-1-ND, Built_By=EMA_UL_Team, Copyright="Copyright (C) 2018 Accelerated Designs. All rights reserved", RefDes=RefDes, Supplier 1=Digi-Key, Type=DEV, Vendor=Yageo
C3 C4: library part CC0805KRX7R9BB10, "CAP CER 0.1UF 50V X7R 0805", Manufacturer_Part_Number=CC0805KRX7R9BB104, Supplier Part Number 1=311-1140-1-ND, Built_By=EMA_UL_Team, Copyright="Copyright (C) 2018 Accelerated Designs. All rights reserved", RefDes=RefDes, Supplier 1=Digi-Key, Type=DEV, Vendor=Yageo
C5: library part C0805C106K9PACTU, "CAP CER 10UF 6.3V X5R 0805", Manufacturer_Part_Number=CC0805KRX7R9BB104, Supplier Part Number 1=399-3138-1-ND, Built_By=EMA_UL_Team, Copyright="Copyright (C) 2018 Accelerated Designs. All rights reserved", RefDes=RefDes, Supplier 1=Digi-Key, Type=DEV, Vendor=Yageo
D1 D2: library part BAT20JFILM, "DIODE SCHOTTKY 23V 1A SOD323", Package="SOD-323 STMicroelectronics", Supplier Part Number 1=497-3381-1-ND, Availability=Unavailable, MF=STMicroelectronics, MP=BAT20JFILM, Price=None, SnapEDA_Link=https://www.snapeda.com/parts/BAT20JFILM/STMicroelectronics/view-part/110314/?ref=snap, Supplier 1=Digi-Key
J1: library part ZX62D-B-5P8(30), "CONN RCPT USB2.0 MICRO B SMD R/A", Supplier Part Number 1=H125272CT-ND, Built_By=EMA_Colton, Copyright="Copyright (C) 2018 Accelerated Designs. All rights reserved", Datasheet=https://www.digikey.com/product-detail/en/hirose-electric-co-ltd/ZX62D-B-5P8-30/H125272TR-ND/5994738, Manufacturer_Part_Number=ZX62D-B-5P8(30), RefDes=RefDes, SourceLibrary=Hirose_2020-02-14, Supplier 1=Digi-Key, Type=DEV, Vendor=Hirose
J2: library part "3x Header Pin", "CONN HEADER VERT 5POS 2.54MM", Manufacturer_Part_Number=77311-818-36LF, Built_By=EMA_UL_Team, Copyright="Copyright (C) 2018 Accelerated Designs. All rights reserved", RefDes=RefDes, SourceLibrary=Amphenol_2013-08-06_Bergstik_1Row_77311, Type=DEV, Vendor=Amphenol
Q1: library part MMBT2222A-7-F, "TRANS NPN 40V 0.6A SMD SOT23-3", Package="SOT-23-3 Diodes Inc.", Supplier Part Number 1=MMBT2222A-FDICT-ND, Digi-Key_Part_Number=MMBT2222A-FDICT-ND, Digi-Key_Purchase_URL=https://www.digikey.in/product-detail/en/diodes-incorporated/MMBT2222A-7-F/MMBT2222A-FDICT-ND/815723?utm_source=snapeda&utm_medium=aggregator&utm_campaign=symbol, MF="Diodes Inc.", MP=MMBT2222A-7-F, SnapEDA_Link=https://www.snapeda.com/parts/MMBT2222A-7-F/Diodes%20Inc./view-part/229424/?ref=snap, Supplier 1=Digi-Key
Q2: library part 2N7002PW,115, "MOSFET N-CH 60V 0.31A SOT323", Manufacturer_Part_Number=2N7002,215, Supplier Part Number 1=1727-4793-1-ND, Built_By=EMA_UL_Team, Copyright="Copyright (C) 2018 Accelerated Designs. All rights reserved", RefDes=RefDes, SourceLibrary=NXP_2011-01-01, Supplier 1=Digi-Key, Type=DEV, Vendor=NXP
R1 R4 R5 R6 R7: library part RC0805FR-0710KL, "RES SMD 10K OHM 1% 1/8W 0805", Supplier Part Number 1=311-10.0KCRCT-ND, Built_By=EMA_UL_Team, Copyright="Copyright (C) 2018 Accelerated Designs. All rights reserved", Manufacturer_Part_Number=RC0805FR-0710KL, RefDes=RefDes, Supplier 1=Digi-Key, Type=DEV, Vendor=Yageo
R2 R3: library part RK73H2ATTD27R0F, "RES 27 OHM 1% 1/4W 0805", Manufacturer_Part_Number=RC0805FR-0710KL, Supplier Part Number 1=2019-RK73H2ATTD27R0FCT-ND, Built_By=EMA_UL_Team, Copyright="Copyright (C) 2018 Accelerated Designs. All rights reserved", RefDes=RefDes, Supplier 1=Digi-Key, Type=DEV, Vendor=Yageo
U1: library part FT231XS-R, "USB Bridge, USB to UART USB 2.0 UART Interface 20-SSOP", Package="SSOP-20 FTDI", Supplier Part Number 1=768-1129-1-ND, Availability=Unavailable, MF=FTDI,, MP=FT231XS-R, Price=None, SnapEDA_Link=https://www.snapeda.com/parts/FT231XS-R/FTDI%2C%20Future%20Technology%20Devices%20International%20Ltd/view-part/48872/?ref=snap, Supplier 1=Digi-Key
U2: library part SN74LV1T34DBVR, "IC BUF NON-INVERT 5.5V SOT23-5", Manufacturer="Texas Instruments", PartNumber=SN74LV1T34DBV, Supplier Part Number 1=296-37176-1-ND, CompType=IC, Copyright="Copyright (C) 2018 Accelerated Designs. All rights reserved", MountType=SMT, PackageReference=DBV0005A, PIN_COUNT=5, RefDes=RefDes, RoHS=Y, Supplier 1=Digi-Key, SymbolVerison=2014-09-28, Type=DEV

## Via types
v1: diameter 24, hole 12, Top Layer to Bottom Layer, 18 vias

## Nets (pads, with @x,y where several pads share a name; then routed paths per layer and width w, separated by ;. In a path a pad name is that pad's centre, name@x,y a point inside that pad or via, vN(x,y) a via of type N, cw(c..) or ccw(c..) an arc to the next point about the centre after c; other vN are vias at no path point)
+3.3: A1.4 C3.2 Q2.1 R1.1 R4.1 R6.1 R7.1 U1.3 U1.13 U1.14 | length 2832
  Top Layer w15: R6.1@6064,1830 6107.88,1786.12 6331.62,1786.12 C3.2@6372.5,1827 ; C3.2 C3.2@6372.5,1827 ; U1.14 U1.13 6479.11,1663.46 6531.58,1663.46 6566.82,1698.71 6566.82,1741 6539.52,1768.3 6434.2,1768.3 6389,1813.5 6386,1813.5 C3.2@6372.5,1827 ; R1.1 6532.5,1367 6546,1353.5 6577.08,1353.5 6600.08,1330.5 6656,1330.5 R4.1@6692.5,1367 ; v1@6606.93,1532.5 6611.75,1537.32 6672.46,1537.32 U1.3 ; R4.1 6694.39,1368.11 v1(6934.04,1368.11)
  Bottom Layer w15: v1(6481.3,1646.65) 6353.4,1518.75 6185.04,1518.75 6185.04,1425.68 6235.66,1375.06 6258.44,1375.06 6281.94,1398.56 6384.2,1398.56 6431.26,1351.5 6497.93,1351.5 6514.04,1367.61 6514.04,1367.9 6528.54,1382.41 v1(6528.54,1384.84) 6544.29,1400.59 6544.29,1516.58 6560.21,1532.5 6608.54,1532.5 v1(6609.57,1533.54) ; A1.4 6865,1745.36 6953.86,1656.5 7000.13,1656.5 7032.5,1624.12 7032.5,1466.57 v1(6934.04,1368.11)
  other v1: 6177.17,1519.68
+5: C4.2 C5.2 D1.C D2.C U1.15 U2.5 | length 1121.8
  Top Layer w15: v1(6237.2,1732.96) 6253.96,1716.21 6253.96,1682.47 D1.C ; U1.15 6479.11,1613.46 6522.41,1613.46 6618.75,1709.8 6618.75,1824.25 C4.2@6624.5,1830 ; C5.2 C4.2@6624.5,1830 ; D2.C 6761.82,1828.74 6723.58,1790.5 6664,1790.5 C4.2@6624.5,1830
  Bottom Layer w15: v1(6237.2,1732.96) 6447.53,1732.96 v1(6530.51,1815.94)
GND: A1.8 C1.1 C2.1 C3.1 C4.1 C5.1 J1.5 J1.S1 J1.S2 J1.S3 J1.S4 J1.S5 J1.S6 J2.3 U1.6 U1.16 U2.3 | length 3669.1
  Top Layer w15: J1.S6@6000,1466.99 J1.S3@6000,1743.56 ; J1.5 6117.74,1548.82 6118.11,1548.44 J1.S2 ; U2.3 6167.7,1832.75 6167.7,1851.72 6180.59,1864.61 6275.89,1864.61 C3.1@6307.5,1833 ; C2.1@6294.5,1360 6307.5,1373 C2.1 ; C1.1@6307.5,1712 C1.1 ; C3.1 C3.1@6307.5,1833 ; U1.16@6462.76,1587.08 6547.5,1587.08 ; C5.1 C5.1@6467.5,1833 ; v1(6576.77,1477.52) 6560.66,1493.63 6560.66,1573.92 6547.5,1587.08 ; U1.6@6657.24,1612.08 6572.5,1612.08 6547.5,1587.08 ; C4.1 C4.1@6692.5,1833 ; J2.3 6922.24,1570.03 6922.24,1773.16 6969.49,1820.4 6969.49,1851.79 6954.15,1867.13 6726.63,1867.13 C4.1@6692.5,1833 ; J2.3@6991.14,1501.14 J2.3@6991.14,1509.41 ; C3.1@6307.5,1833 6344,1869.5 6431,1869.5 C5.1@6467.5,1833 ; C5.1@6467.5,1833 6504,1869.5 6656,1869.5 C4.1@6692.5,1833
  Bottom Layer w15: J1.S6@6000,1466.99 6075.29,1466.99 J1.S2@6118.11,1509.8 ; J1.S3@6000,1743.56 6075.29,1743.56 J1.S1@6118.11,1700.75 ; J1.S1 6301.58,1695.47 v1(6307.09,1700.98) ; J1.S2@6118.42,1509.5 6118.42,1459.77 6226.75,1351.44 6284.04,1351.44 6303.67,1371.06 v1(6306.1,1371.06) 6379.17,1371.06 6421.73,1328.5 6528.31,1328.5 6576.77,1376.97 v1(6576.77,1477.52) 6604.29,1450 A1.8 6810.5,1404.5 6894.5,1404.5 J2.3@6991.14,1501.14
NetA1_1: A1.1 U1.4 | length 387.9
  Top Layer w8: v1(6590,1560) 6591.51,1561.51 U1.4@6656.67,1561.51
  Bottom Layer w8: v1(6590,1560) 6592.46,1557.54 6619.52,1557.54 6669.06,1508 6807,1508 A1.1
NetA1_2: A1.2 R7.2 | length 237.4
  Top Layer w15: A1.2 6999.04,1415.96 R7.2
NetA1_3: A1.3 R5.2 U1.2 | length 1080
  Top Layer w8: R5.2 6064,1375.05 6106.3,1417.35 6176.18,1417.35 6201.19,1392.34 6201.19,1359.01 6226.2,1334 6398.47,1334 6413.39,1348.91 6413.39,1405.61 6461.29,1453.52 6586.71,1453.52 6600.77,1467.57 6600.77,1487.46 6621.32,1508.01 U1.2@6653.17,1508.01 ; U1.2@6661.32,1508 6785.93,1508 6810.5,1532.57 6810.5,1595.5 A1.3
NetA1_5: A1.5 U1.20 | length 432.9
  Bottom Layer w8: v1(6470,1483.23) 6470,1530 6690,1750 A1.5
NetA1_6: A1.6 Q1.2 | length 698
  Bottom Layer w8: v1(6247.05,1402.56) 6262.55,1418.06 6392.27,1418.06 6407.22,1403.12 6479.43,1403.12 6494.84,1418.52 6494.84,1529.84 6615,1650 A1.6
NetA1_7: A1.7 R1.2 U2.2 | length 1343
  Bottom Layer w8: v1(6198.82,1827.76) 6200.27,1827.76 6216.52,1844 6747.97,1844 6807,1784.97 6807,1592 A1.7 6725,1590 6580,1590 6510.84,1520.84 6510.84,1403.3 v1(6486.54,1379)
NetD1_A: D1.A J1.1 | length 76.2
  Top Layer w8: D1.A@6168.31,1673.64 D1.A
  Top Layer w15: J1.1 6145.85,1651.18 D1.A@6168.31,1673.64
NetD2_A: D2.A J2.1 | length 136.2
  Top Layer w15: J2.1 6987,1794.09 7017.72,1824.8 D2.A
NetJ2_2: J2.2 U2.4 | length 1081.1
  Bottom Layer w8: v1(6161.42,1731.7) 6161.42,1824.3 6197.12,1860 6754.6,1860 6823,1791.6 6823,1732.6 6847.6,1708 6874.78,1708 6977.78,1605 J2.2@6995,1605
NetQ1_1: Q1.1 R5.1 | length 201.6
  Top Layer w8: R5.1 5999,1369.05 6032,1336.05 6134.51,1336.05 6158.82,1360.35 Q1.1
NetQ1_3: Q1.3 Q2.3 R6.2 | length 653.1
  Top Layer w8: R6.2 5999,1830 6051.1,1777.9 6051.1,1521.4 6100.64,1471.86 6191.82,1471.86 6198.82,1464.86 Q1.3 6204.65,1461.18 6204.65,1585.15 Q2.3
NetQ2_2: Q2.2 R4.2 U1.1 | length 597.2
  Top Layer w8: Q2.2 6235.65,1478.37 6283.46,1430.55 ; v1(6469.49,1427.12) 6573.38,1427.12 6613.69,1386.81 6627.5,1386.81 6627.5,1483.01 6631.57,1487.08 U1.1@6657.24,1487.08
  Bottom Layer w8: v1(6277.15,1442.06) 6446.16,1442.06 v1@6460.63,1427.59
USB1_N: C1.2 J1.2 R2.2 | length 453.8
  Top Layer w8: J1.2 6109.11,1621.8 6145.88,1621.8 6167.23,1643.15 6231.07,1643.15 6261.49,1612.73 6261.49,1569.19 6279.19,1551.5 6285.81,1551.5 6290.5,1556.19 6290.5,1583 R2.2 6307.5,1603 6355.5,1651 6355.5,1698 C1.2
USB1_P: C2.2 J1.3 R3.2 | length 453.8
  Top Layer w8: J1.3 6109.11,1603.8 6153.33,1603.8 6174.69,1625.15 6223.62,1625.15 6243.49,1605.27 6243.49,1561.74 6271.73,1533.5 6285.81,1533.5 6290.5,1528.81 6290.5,1502 R3.2 6307.5,1482 6355.5,1434 6355.5,1387 C2.2
USB2_N: R2.1 U1.12 | length 411.6
  Top Layer w8: R2.1@6380.77,1608.27 R2.1 6372.5,1603 6405.51,1636.01 6405.51,1728.67 6425.65,1748.8 6531.44,1748.8 6547.32,1732.92 6547.32,1710.06 6529.23,1691.96 6482.61,1691.96 U1.12
USB2_P: R3.1 U1.11 | length 455.7
  Top Layer w8: R3.1@6389.5,1502 R3.1 6372.5,1488 6423.51,1539.01 6423.51,1721.21 6433.1,1730.8 6523.98,1730.8 6529.32,1725.46 6529.32,1717.52 6522.64,1710.83 6480.6,1710.83 U1.11
pads on no net: J1.4 U1.5 U1.7 U1.8 U1.9 U1.10 U1.17 U1.18 U1.19 U2.1

## Silkscreen, mask and mechanical layers (free items; w line width, h text height)
Bottom Overlay:
  drawing of 15 lines, arcs and shapes, not listed

## Text inside footprints (layer, text, board x,y; h text height)
J1: Mechanical 4 "PCB END" at 5937.99,1363.78 h73.82 r270; Mechanical 4 "PCB END" at 5937.99,1363.78 h73.82 r270